# Altium PCB ChipTanks.PcbDoc
Units mil, origin at the board's own origin, x right, y up, seen from the top; angles counter-clockwise.
Board outline 3543.31 x 1181.1 mil, 2 copper layers (Top Layer, Bottom Layer), stack 65.792 mil thick; 56 components, 38 nets, 223 pads, 154 vias.
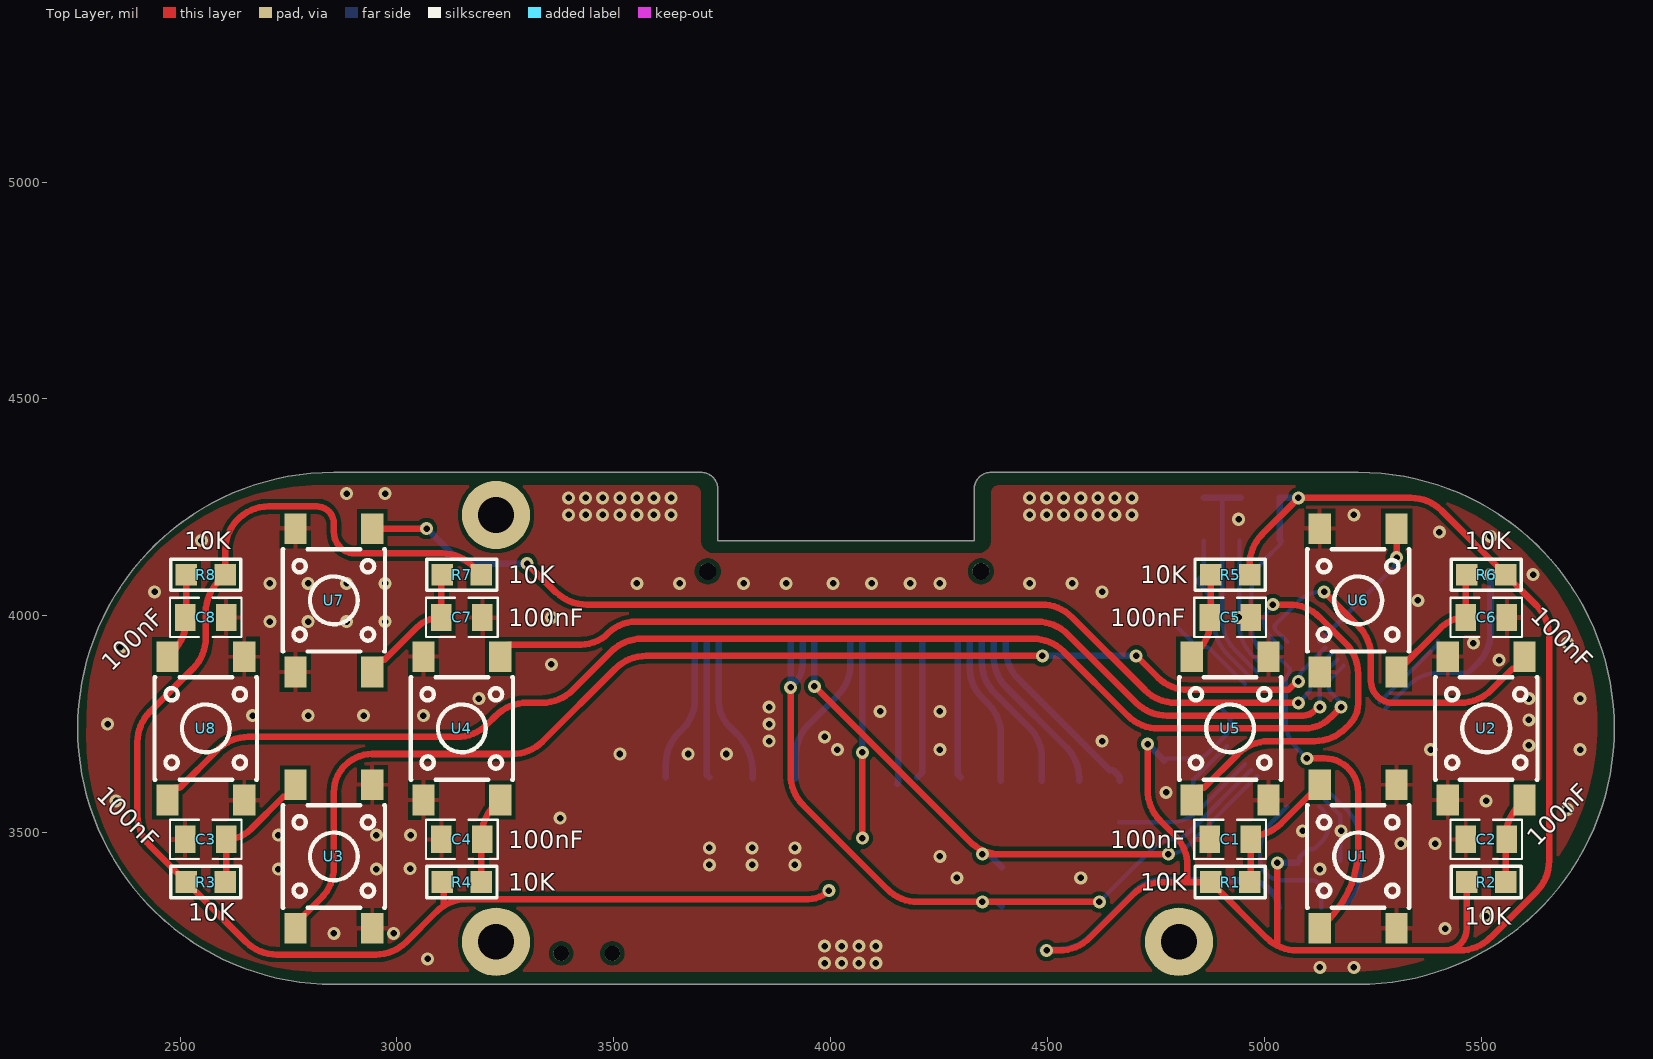
[diagram p0: Top Layer view]
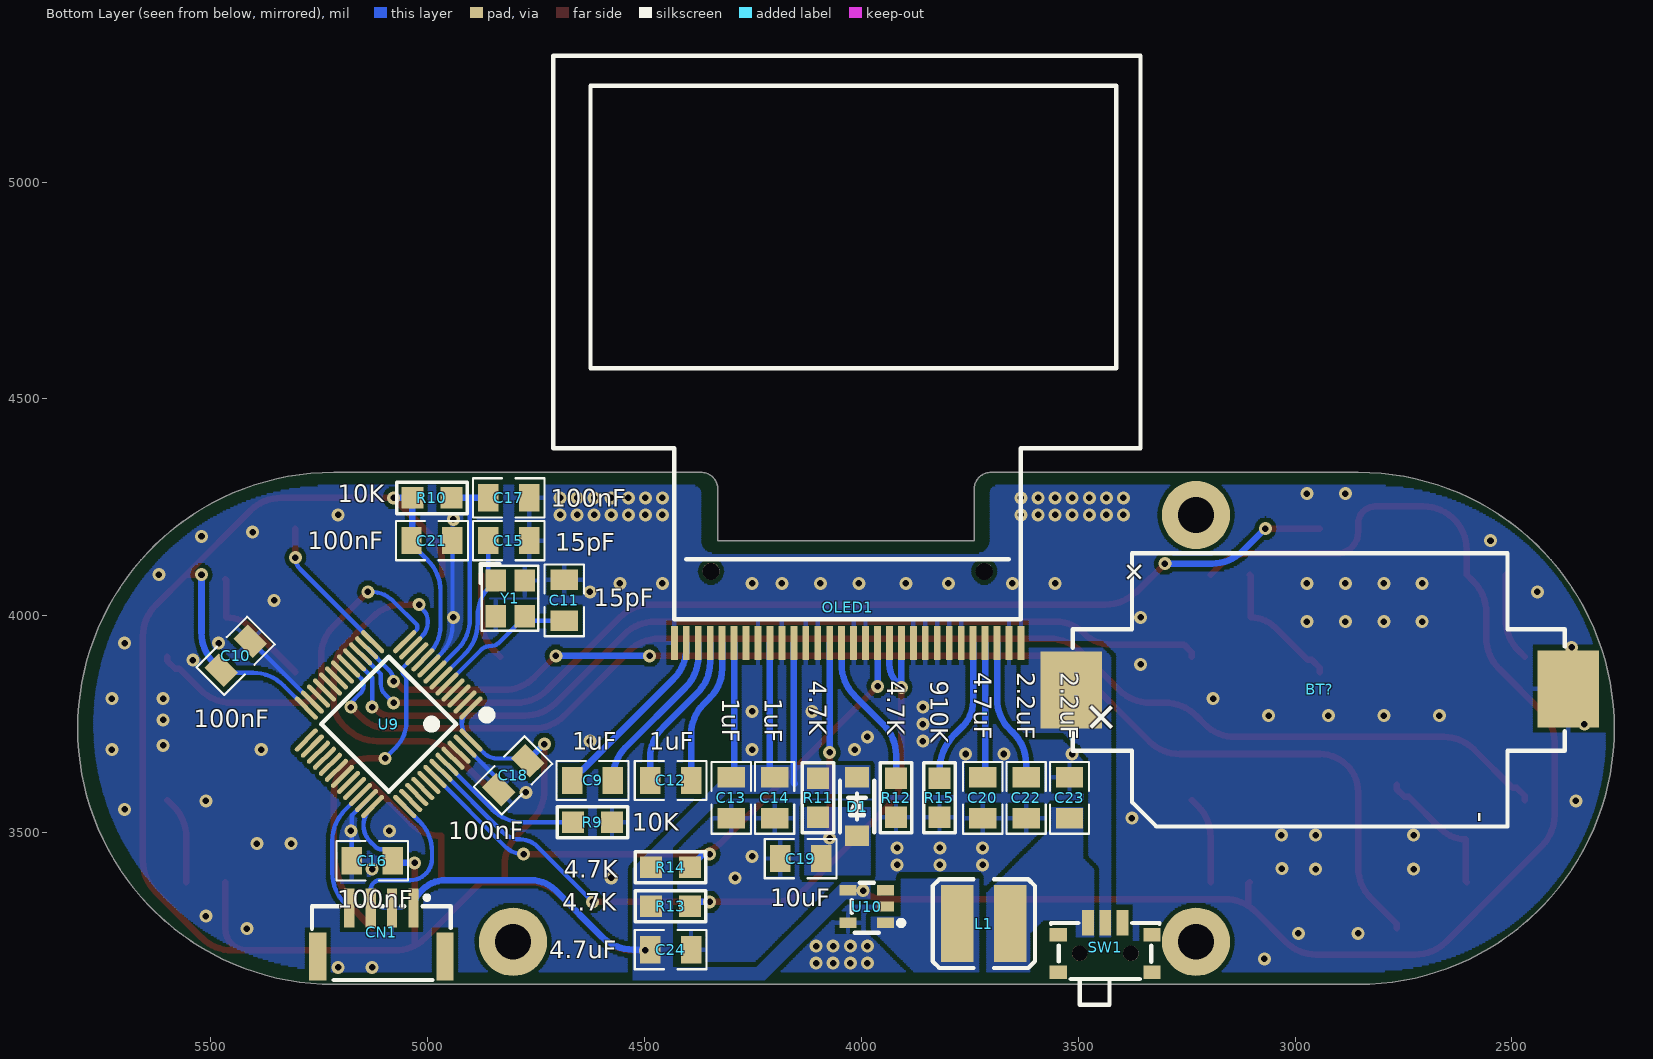
[diagram p1: Bottom Layer view, seen from below]
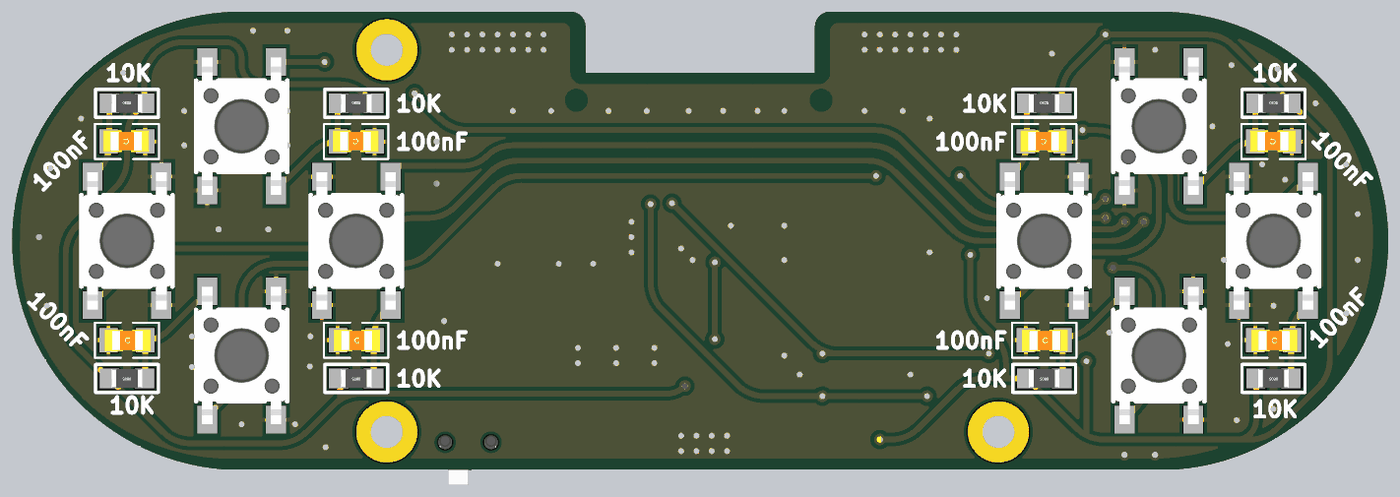
[diagram p2: 3D render of the assembled board from above, using the file's embedded part models]
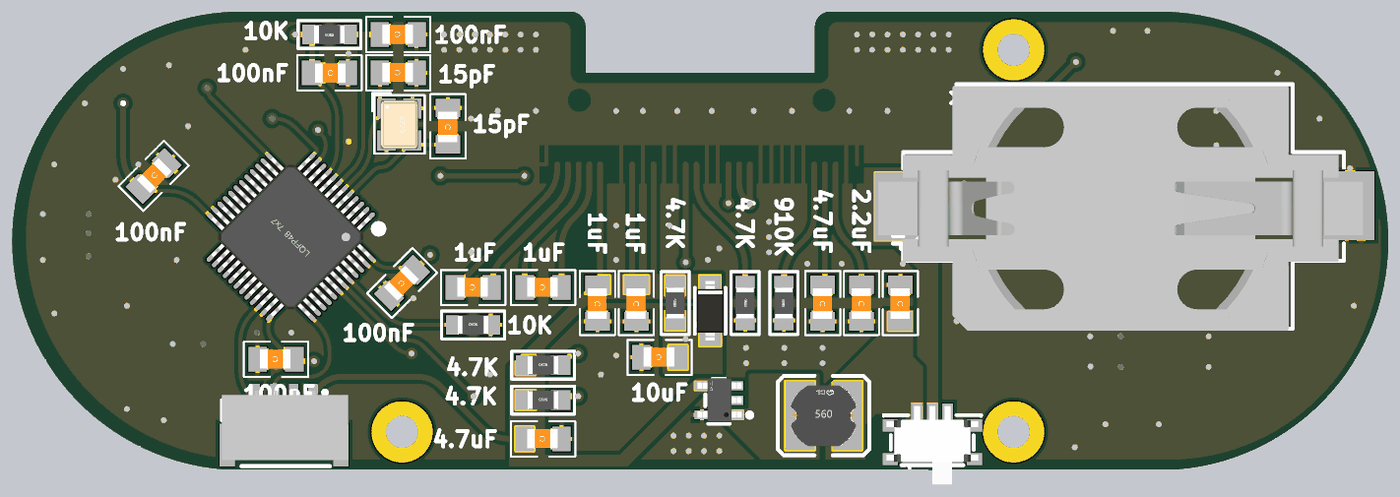
[diagram p3: 3D render of the assembled board from below, using the file's embedded part models]

## Layer stack, top to bottom
Top Solder: solder mask 0.4, Solder Resist, Dk 3.5
Top Layer: signal copper 1.4
Dielectric 1: dielectric 62.992, FR-4, Dk 4.8
Bottom Layer: signal copper 1.4
Bottom Solder: solder mask 0.4, Solder Resist, Dk 3.5

## Board outline
2854.33,3149.61 cw(c2854.33,3740.16) 2854.33,4330.71 3700.79,4330.71 cw(c3700.79,4291.34) 3740.16,4291.34 3740.16,4173.23 4330.71,4173.23 4330.71,4291.34 cw(c4370.08,4291.34) 4370.08,4330.71 5216.54,4330.71 cw(c5216.54,3740.16) 5216.54,3149.61

## Design rules (kind name [scope] priority, off if disabled: settings)
Clearance [All] p1: gap=6 ignorepadtopadclearanceinfootprint=FALSE except(0: Arc-Hole Track-Hole SMDPad-Hole THPad-Hole Via-Hole Fill-Hole Poly-Hole Region-Hole Text-Hole; 10: Arc-Fill Arc-Poly Arc-Region Track-Fill Track-Poly Track-Region SMDPad-Fill SMDPad-Poly SMDPad-Region THPad-Fill THPad-Poly THPad-Region Via-Fill Via-Poly Via-Region Fill-Fill Fill-Poly Fill-Region Poly-Poly Poly-Region Region-Region)
ComponentClearance [All] p1: gap=10 collisioncheckmode=3 verticalgap=10 showdistances=FALSE donotcheckwithout3dbody=TRUE
MinimumSolderMaskSliver [All] p1: minsoldermaskwidth=0
PlaneConnect [All] p1: planeconnectstyle=Direct reliefexpansion=20 reliefentries=4 reliefconductorwidth=10 reliefairgap=10
PolygonConnect PolygonConnect_8 [All vs IsNamedPolygon('GND_L02_P018')] p1: thpad.connectstyle=Relief thpad.reliefconductorwidth=10 thpad.reliefentries=4 thpad.polygonreliefangle="90 Angle" thpad.airgapwidth=10 smdpad.connectstyle=Relief smdpad.reliefconductorwidth=10 smdpad.reliefentries=4 smdpad.polygonreliefangle="90 Angle" smdpad.airgapwidth=10 via.connectstyle=Direct via.reliefconductorwidth=10 via.reliefentries=4 via.polygonreliefangle="90 Angle" via.airgapwidth=10
PolygonConnect PolygonConnect_7 [All vs IsNamedPolygon('GND_L01_P016')] p2: thpad.connectstyle=Relief thpad.reliefconductorwidth=10 thpad.reliefentries=4 thpad.polygonreliefangle="90 Angle" thpad.airgapwidth=10 smdpad.connectstyle=Relief smdpad.reliefconductorwidth=10 smdpad.reliefentries=4 smdpad.polygonreliefangle="90 Angle" smdpad.airgapwidth=10 via.connectstyle=Direct via.reliefconductorwidth=10 via.reliefentries=4 via.polygonreliefangle="90 Angle" via.airgapwidth=10
PolygonConnect PolygonConnect_6 [All vs IsNamedPolygon('GND_L02_P009')] p3: thpad.connectstyle=Relief thpad.reliefconductorwidth=10 thpad.reliefentries=4 thpad.polygonreliefangle="90 Angle" thpad.airgapwidth=10 smdpad.connectstyle=Relief smdpad.reliefconductorwidth=10 smdpad.reliefentries=4 smdpad.polygonreliefangle="90 Angle" smdpad.airgapwidth=10 via.connectstyle=Direct via.reliefconductorwidth=10 via.reliefentries=4 via.polygonreliefangle="90 Angle" via.airgapwidth=10
PolygonConnect PolygonConnect_5 [All vs IsNamedPolygon('GND_L01_P008')] p4: thpad.connectstyle=Relief thpad.reliefconductorwidth=10 thpad.reliefentries=4 thpad.polygonreliefangle="90 Angle" thpad.airgapwidth=10 smdpad.connectstyle=Relief smdpad.reliefconductorwidth=10 smdpad.reliefentries=4 smdpad.polygonreliefangle="90 Angle" smdpad.airgapwidth=10 via.connectstyle=Direct via.reliefconductorwidth=10 via.reliefentries=4 via.polygonreliefangle="90 Angle" via.airgapwidth=10
PolygonConnect 111 [All vs IsNamedPolygon('GND_L01_P008')] p5: thpad.connectstyle=Direct thpad.reliefconductorwidth=10 thpad.reliefentries=4 thpad.polygonreliefangle="90 Angle" thpad.airgapwidth=10 smdpad.connectstyle=Relief smdpad.reliefconductorwidth=10 smdpad.reliefentries=4 smdpad.polygonreliefangle="90 Angle" smdpad.airgapwidth=10 via.connectstyle=Relief via.reliefconductorwidth=10 via.reliefentries=4 via.polygonreliefangle="90 Angle" via.airgapwidth=10
PolygonConnect PolygonConnect_4 [All vs IsNamedPolygon('GND_L01_P008')] p6: thpad.connectstyle=Direct thpad.reliefconductorwidth=10 thpad.reliefentries=4 thpad.polygonreliefangle="90 Angle" thpad.airgapwidth=10 smdpad.connectstyle=Relief smdpad.reliefconductorwidth=10 smdpad.reliefentries=4 smdpad.polygonreliefangle="90 Angle" smdpad.airgapwidth=10 via.connectstyle=Relief via.reliefconductorwidth=10 via.reliefentries=4 via.polygonreliefangle="90 Angle" via.airgapwidth=10
PolygonConnect PolygonConnect_3 [All vs IsNamedPolygon('GND_L02_P009')] p7: thpad.connectstyle=Direct thpad.reliefconductorwidth=10 thpad.reliefentries=4 thpad.polygonreliefangle="90 Angle" thpad.airgapwidth=10 smdpad.connectstyle=Relief smdpad.reliefconductorwidth=10 smdpad.reliefentries=4 smdpad.polygonreliefangle="90 Angle" smdpad.airgapwidth=10 via.connectstyle=Relief via.reliefconductorwidth=10 via.reliefentries=4 via.polygonreliefangle="90 Angle" via.airgapwidth=10
PolygonConnect PolygonConnect_2 [All vs IsNamedPolygon('GND_L02_P009')] p8: connectstyle=Relief reliefconductorwidth=10 reliefentries=4 polygonreliefangle="90 Angle" airgapwidth=10
PolygonConnect PolygonConnect_1 [All vs IsNamedPolygon('GND_L01_P008')] p9: connectstyle=Relief reliefconductorwidth=10 reliefentries=4 polygonreliefangle="90 Angle" airgapwidth=10
PolygonConnect [All] p10: connectstyle=Direct reliefconductorwidth=10 reliefentries=4 polygonreliefangle="90 Angle" airgapwidth=10
RoutingVias [All] p1: holewidth=28 width=50 viastyle="Through Hole" minholewidth=15 minwidth=30 maxholewidth=28 maxwidth=50
SilkToSilkClearance [All] p1: silktosilkclearance=0
SilkToSolderMaskClearance [IsPad] p1: minsilkscreentomaskgap=0 clearancetoexposedcopper=TRUE
SolderMaskExpansion [All] p1: expansion=4 istentingtop=FALSE
Width [All] p1: maxlimit=15 minlimit=10 preferedwidth=10
25 further rules are at their usual default settings.

## Components (designator, comment, footprint, x,y, rotation, side; value= is the part's Value field where it differs from the comment)
BT? "BS-06-B4AA002" BAT-SMD_BS-06-B4BK006-1 2942.91,3828.74 r180 bottom
C1 "100nF" C0805 4921.26,3484.25 r0 top
C2 "100nF" C0805 5511.81,3484.25 r0 top
C3 "100nF" C0805 2559.06,3484.25 r0 top
C4 "100nF" C0805 3149.61,3484.25 r0 top
C5 "100nF" C0805 4921.26,3996.06 r180 top
C6 "100nF" C0805 5511.81,3996.06 r180 top
C7 "100nF" C0805 3149.61,3996.06 r180 top
C8 "100nF" C0805 2559.06,3996.06 r180 top
C9 "1uF" C0805 4620,3620 r0 bottom
C10 "100nF" C0805 5442.91,3907.48 r135 bottom
C11 "15pF" C0805 4685.04,4035.43 r270 bottom
C12 "1uF" C0805 4440,3620 r0 bottom
C13 "1uF" C0805 4300,3580 r270 bottom
C14 "1uF" C0805 4200,3580 r270 bottom
C15 "15pF" C0805 4812.99,4173.23 r0 bottom
C16 "100nF" C0805 5127.95,3435.04 r0 bottom
C17 "100nF" C0805 4812.99,4271.65 r0 bottom
C18 "100nF" C0805 4803.15,3631.89 r315 bottom
C19 "10uF" C0805 4140,3440 r0 bottom
C20 "4.7uF" C0805 3720,3580 r270 bottom
C21 "100nF" C0805 4990.16,4173.23 r180 bottom
C22 "2.2uF" C0805 3620,3580 r270 bottom
C23 "2.2uF" C0805 3520,3580 r270 bottom
C24 "4.7uF" C0805 4440,3230 r0 bottom
CN1 "卧式STLINK" CONN-SMD_4P-P1.25_GH1.25-4P 5106.85,3270 r180 bottom
D1 "12V" SOD-123 4010,3560 r90 bottom
L1 "2.2uH" IND-SMD_L4.5-W4.0 3717.64,3290 r0 bottom value=22uH
OLED1 "UG-2864KSWLG01" OLED-1.3 4033.52,4596.97 r0 bottom locked
R1 "10K" "R 0805_M" 4921.26,3385.83 r180 top
R2 "10K" "R 0805_M" 5511.81,3385.83 r180 top
R3 "10K" "R 0805_M" 2559.06,3385.83 r180 top
R4 "10K" "R 0805_M" 3149.61,3385.83 r180 top
R5 "10K" "R 0805_M" 4921.26,4094.49 r0 top
R6 "10K" "R 0805_M" 5511.81,4094.49 r0 top
R7 "10K" "R 0805_M" 3149.61,4094.49 r0 top
R8 "10K" "R 0805_M" 2559.06,4094.49 r0 top
R9 "10K" "R 0805_M" 4620.18,3523.62 r180 bottom
R10 "10K" "R 0805_M" 4990.16,4271.65 r0 bottom
R11 "4.7K" "R 0805_M" 4100,3580 r90 bottom
R12 "4.7K" "R 0805_M" 3920,3580 r270 bottom
R13 "4.7K" "R 0805_M" 4440,3330 r180 bottom
R14 "4.7K" "R 0805_M" 4440,3420 r180 bottom
R15 "910K" "R 0805_M" 3820,3580 r90 bottom
SW1 "MINI MSK12CO2" SW-SMD_MSK12CO2 3437.64,3210 r180 bottom
U1 "TPS645-5NC105" SW-SMD_4P-L6.0-W6.0-P4.50-LS9.2 5216.54,3444.88 r90 top locked
U2 "TPS645-5NC105" SW-SMD_4P-L6.0-W6.0-P4.50-LS9.2 5511.81,3740.16 r270 top locked
U3 "TPS645-5NC105" SW-SMD_4P-L6.0-W6.0-P4.50-LS9.2 2854.33,3444.88 r90 top locked
U4 "TPS645-5NC105" SW-SMD_4P-L6.0-W6.0-P4.50-LS9.2 3149.61,3740.16 r270 top locked
U5 "TPS645-5NC105" SW-SMD_4P-L6.0-W6.0-P4.50-LS9.2 4921.26,3740.16 r90 top locked
U6 "TPS645-5NC105" SW-SMD_4P-L6.0-W6.0-P4.50-LS9.2 5216.54,4035.43 r270 top locked
U7 "TPS645-5NC105" SW-SMD_4P-L6.0-W6.0-P4.50-LS9.2 2854.33,4035.43 r270 top locked
U8 "TPS645-5NC105" SW-SMD_4P-L6.0-W6.0-P4.50-LS9.2 2559.06,3740.16 r90 top locked
U9 "STM32F103C8T6" "LQFP48 7X7_N" 5090,3750 r45 bottom
U10 "TPS613221ADBVR" SOT-23-5_L2.9-W1.6-P0.95-LS2.8-BR 3976.38,3326.77 r180 bottom
Y1 "3225贴片晶振" OSC-3225-4P 4810,4040 r270 bottom value=16M

## Footprints (in the part's own frame and the unit in brackets; to place one, negate y for a bottom-side part, rotate by r counter-clockwise, add the part's x,y. Pads: shape width x height; smd on the part's side, far side on the other; paste and mask are expansions set on the pad)
BAT-SMD_BS-06-B4BK006-1 [mm]
  rect 3.6x4.5 smd paste+0 mask+0.051: 2(-14.55,0) 3(14.55,0.064)
  silkscreen extent -14.48,-8 14.35,8, body extent -16.1,-8.13 15.6,7.87, height 5.5
C0805 [mm]
  rect 1.2x1.6 smd: 1(-1.2,0) 2(1.2,0)
  silkscreen extent -2.1,-1.15 2.1,1.15, body extent -1.46,-0.72 1.54,0.68, height 0.93
CONN-SMD_4P-P1.25_GH1.25-4P [mm]
  rect 0.6x2.3 smd mask+0.051: 1(1.875,1.425) 2(0.625,1.425) 3(-0.625,1.425) 4(-1.875,1.425)
  rect 1x2.8 smd mask+0.051: 5(-3.725,-1.425) 6(3.725,-1.425)
  silkscreen extent -4.06,-2.8 4.06,2.16, body extent -4.07,-2.4 4.19,2.15, height 4.13
IND-SMD_L4.5-W4.0 [mm]
  rect 1.9x4.5 smd: 1(-1.55,0) 2(1.55,0)
  silkscreen extent -3,-2.6 3,2.6, body extent -2.16,-2 2.16,2, height 3.21
"LQFP48 7X7_N" [mm] "48脚，体宽7x7mm，脚距0.5mm"
  oval 0.279x1.8 smd: 1(-2.75,-4.075) 2(-2.25,-4.075) 3(-1.75,-4.075) 4(-1.25,-4.075) 5(-0.75,-4.075) 6(-0.25,-4.075) 7(0.25,-4.075) 8(0.75,-4.075) 9(1.25,-4.075) 10(1.75,-4.075) 11(2.25,-4.075) 12(2.75,-4.075) 25(2.75,4.075) 26(2.25,4.075) 27(1.75,4.075) 28(1.25,4.075) 29(0.75,4.075) 30(0.25,4.075) 31(-0.25,4.075) 32(-0.75,4.075) 33(-1.25,4.075) 34(-1.75,4.075) 35(-2.25,4.075) 36(-2.75,4.075)
  oval 1.8x0.279 smd: 13(4.075,-2.75) 14(4.075,-2.25) 15(4.075,-1.75) 16(4.075,-1.25) 17(4.075,-0.75) 18(4.075,-0.25) 19(4.075,0.25) 20(4.075,0.75) 21(4.075,1.25) 22(4.075,1.75) 23(4.075,2.25) 24(4.075,2.75) 37(-4.075,2.75) 38(-4.075,2.25) 39(-4.075,1.75) 40(-4.075,1.25) 41(-4.075,0.75) 42(-4.075,0.25) 43(-4.075,-0.25) 44(-4.075,-0.75) 45(-4.075,-1.25) 46(-4.075,-1.75) 47(-4.075,-2.25) 48(-4.075,-2.75)
  silkscreen extent -3.93,-4.69 2.79,2.79, body extent -4.5,-4.5 4.5,4.5, height 1.45
OLED-1.3 [mm]
  rect 0.4x2 smd paste+0 mask+0.051: 1(10.102,16.763) 2(9.402,16.764) 3(8.702,16.763) 4(8.002,16.763) 5(7.302,16.763) 6(6.603,16.763) 7(5.903,16.763) 8(5.203,16.763) 9(4.503,16.763) 10(3.803,16.763) 11(3.102,16.763) 12(2.402,16.763) 13(1.702,16.763) 14(1.002,16.763) 15(0.303,16.763) 16(-0.397,16.763) 17(-1.097,16.763) 18(-1.797,16.763) 19(-2.498,16.764) 20(-3.197,16.763) 21(-3.898,16.762) 22(-4.598,16.763) 23(-5.298,16.763) 24(-5.998,16.763) 25(-6.698,16.764) 26(-7.397,16.763) 27(-8.097,16.764) 28(-8.797,16.763) 29(-9.497,16.763) 30(-10.197,16.763)
  round 1 hole 1 unplated paste+0: ""(-8.048,12.563) ""(7.953,12.563)
  silkscreen extent -17.2,-17.64 17.2,15.37, body extent -17.25,-17.22 17.25,17.79, height 1.42
OSC-3225-4P [mm] "3.2*2.5*0.7mm(长宽高)                             淘宝ID:黄晶宝石"
  rect 1.3x1.2 smd: 1(-1.05,-0.85) 2(1.05,-0.85) 3(1.05,0.85) 4(-1.05,0.85)
  silkscreen extent -2.03,-1.75 1.91,1.65, body extent -1.6,-1.25 1.6,1.25, height 0.7
"R 0805_M" [mil] "1/8W贴片电阻"
  rect 50x50 smd: 1(-45,0) 2(45,0)
  silkscreen extent -81,-36 81,36, body extent -39,-25 39,25, height 20
SOD-123 [mm]
  rect 1.2x1.4 smd: 1(-1.7,0) 2(1.7,0)
  silkscreen extent -1.5,-1 1.5,1, body extent -1.95,-0.9 1.95,0.9, height 1.18
SOT-23-5_L2.9-W1.6-P0.95-LS2.8-BR [mm]
  rect 1x0.6 smd paste+0 mask+0.05: 1(0.82,-0.886) 2(0.82,0.064) 3(0.82,1.013) 4(-1.38,1.014) 5(-1.38,-0.886)
  silkscreen extent -1.17,-1.46 1.88,1.46, body extent -1.69,-1.36 1.21,1.54, height 1.09
SW-SMD_4P-L6.0-W6.0-P4.50-LS9.2 [mm]
  rect 1.8x1.3 smd paste+0 mask+0.051: 1(-4.2,2.25) 2(4.2,2.25) 3(-4.2,-2.25) 4(4.2,-2.25)
  silkscreen extent -3,-3 3,3, body extent -4.5,-3 4.5,3, height 6.51
SW-SMD_MSK12CO2 [mm]
  rect 0.7x1.5 smd paste+0 mask+0.051: 1(-1,2.089) 2(0,2.089) 3(1,2.089)
  rect 1x0.8 smd paste+0 mask+0.051: 4(-2.75,-0.812) 4(-2.75,1.389) 5(2.75,-0.812) 5(2.75,1.388)
  round 0.9 hole 0.9 unplated paste+0: ""(-1.5,0.288) ""(1.5,0.288)
  silkscreen extent -3.17,-2.71 3.18,2.07, body extent -3,-2.49 3,2.66, height 1.4

## Part data
C1 C2 C3 C4 C5 C6 C7 C8 C9 C10 C11 C12 C13 C14 C15 C16 C17 C18 C19 C20 C21 C22 C23 C24: library part 0402贴片电容, "贴片电容0402"
D1: library part "DIODE ZENER", "稳压二极管"
L1: library part CD43功率电感, "功率电感", DC Resistance (DCR)=230mΩ, JLCPCB Part Class="Extended Part", LCSC Part Name="22uH ±20%", Manufacturer=MINGSTAR(登壹), Manufacturer Part=CD43N-220M, Rated Current=930mA, Ratings=-, Tolerance=±20%, Add into BOM=yes, Convert to PCB=yes, Datasheet=https://atta.szlcsc.com/upload/public/pdf/source/20210524/C2832086_3DE1D5B4C4DE81ED72BC30D5D3934BF5.pdf, Device=CD43N-220M, Name=22uH, Saturation Current (Isat)=-, Supplier=LCSC, Supplier Footprint=SMD,4.5x4mm, Supplier Part=C2832086, Symbol=CD43N-220M
R1 R2 R3 R4 R5 R6 R7 R8 R9 R10 R11 R12 R13 R14 R15: library part 0402贴片电阻, "0402贴片电阻"
U9: JLCPCB Part Class="Extended Part", Low-Voltage Detect=有, Manufacturer=ST(意法半导体), Operating Temperature Range=-40℃~+85℃, Operating Voltage Range=2V~3.6V, ADC (Bit)=12bit, Add into BOM=yes, CCP Capture/Compare=-, communication protocol=-, Convert to PCB=yes, CPU Core=ARM-M3, CPU Maximum Speed=72MHz, DAC (Bit)=-, Datasheet=https://atta.szlcsc.com/upload/public/pdf/source/20220812/8363ACEC51AD55ECEB84799464F7CB85.pdf, Device=STM32F103C8T6, Direct Memory Access=有, GPIO Ports Number=37, Infrared Data Association=有, Internal Comparator=-, Internal Oscillator=有, LCSC Part Name=STM32F103C8T6, Manufacturer Part=STM32F103C8T6, Name=STM32F103C8T6, Peripheral/Function=看门狗；DMA；看门狗；温度传感器, Program Memory Type=FLASH, Program Storage Size=64KB, PWM (Bit)=-, RAM Size=20KB, Real-Time Clock=-, Secure Digital Input and Output=-, Supplier=LCSC, Supplier Footprint=LQFP-48(7x7), Supplier Part=C8734, Symbol=STM32F103C8T6, Universal Serial Bus=有, Watchdog=有

## Free pads (board coordinates)
  round 157.48 hole 82.68: 5(3228.35,3248.03) 5(3228.35,4232.28) 5(4803.15,3248.03)

## Via types
v1: diameter 30, hole 15, Top Layer to Bottom Layer, tented both sides, 154 vias

## Nets (pads, with @x,y where several pads share a name; then routed paths per layer and width w, separated by ;. In a path a pad name is that pad's centre, name@x,y a point inside that pad or via, vN(x,y) a via of type N, cw(c..) or ccw(c..) an arc to the next point about the centre after c; other vN are vias at no path point)
GND: BT?.3 C1.1 C2.1 C3.1 C4.1 C5.1 C6.1 C7.1 C8.1 C10.2 C11.1 C13.2 C14.2 C15.1 C16.2 C17.1 C18.2 C19.2 C20.2 C21.2 C22.2 C23.1 C24.1 CN1.2 OLED1.1 OLED1.8 OLED1.10 OLED1.12 OLED1.13 OLED1.16 OLED1.17 OLED1.21 OLED1.22 OLED1.23 OLED1.24 OLED1.25 OLED1.29 OLED1.30 R9.2 R12.2 R15.1 U1.3 U1.4 U2.3 U2.4 U3.3 U3.4 U4.3 U4.4 U5.3 U5.4 U6.3 U6.4 U7.3 U7.4 U8.3 U8.4 U9.8 U9.23 U9.35 U9.47 U10.2 U10.5 Y1.2 Y1.4 | length 788.7
  Bottom Layer w10: C18.2 4836.56,3621.83 U9.47 ; C21.2 4942.91,3977.39 ccw(c5035.97,3977.39) 4970.17,3911.59 U9.8 ; U9.35 5175.2,3539.53 C16.2 ; U9.23 5399.66,3934.39 C10.2@5399.66,3940.89
  other v1: 5127.95,3188.98 5206.69,3188.98 3986.22,3198.82 4025.59,3198.82 4064.96,3198.82 4104.33,3198.82 3070.87,3208.66 3986.22,3238.19 4025.59,3238.19 4064.96,3238.19 4104.33,3238.19 2854.33,3267.72 2992.13,3267.72 5416.97,3278.18 5511.81,3307.09 4291.34,3395.67 4576.77,3395.67 2726.38,3415.35 2952.76,3415.35 5127.95,3415.35 3030.22,3416.73 3720.47,3425.2 3818.9,3425.2 3917.32,3425.2 4251.97,3444.88 3720.47,3464.57 3818.9,3464.57 3917.32,3464.57 5314.96,3474.41 5393.7,3474.41 2726.38,3494.09 2952.76,3494.09 3031.5,3494.09 5088.58,3503.94 5177.17,3503.94 3375.98,3533.46 5698.82,3553.15 2352.36,3572.83 5511.81,3572.83 4773.62,3592.52 3513.78,3681.1 3671.26,3681.1 3759.84,3681.1 4015.75,3690.94 4251.97,3690.94 5383.86,3690.94 5728.35,3690.94 5610.24,3700.79 3858.27,3710.63 4625.98,3710.63 3986.22,3720.47 2332.68,3750 3858.27,3750 5610.24,3759.84 2667.32,3769.68 2795.28,3769.68 2923.23,3769.68 3061.02,3769.68 4114.17,3779.53 4251.97,3779.53 3858.27,3789.37 3188.98,3809.06 5610.24,3809.06 5728.35,3809.06 3356.3,3887.8 5541.34,3897.64 2362.2,3927.17 5482.28,3937.01 5698.82,3937.01 2706.69,3986.22 2795.28,3986.22 2883.86,3986.22 2972.44,3986.22 3356.3,3996.06 4940.94,3996.06 5354.33,4035.43 2440.94,4055.12 4625.98,4055.12 2706.69,4074.8 2795.28,4074.8 2883.86,4074.8 2972.44,4074.8 3553.15,4074.8 3651.57,4074.8 3799.21,4074.8 3897.64,4074.8 4005.91,4074.8 4094.49,4074.8 4183.07,4074.8 4251.97,4074.8 4458.66,4074.8 4557.09,4074.8 5620.08,4094.49 2549.21,4173.23 5521.65,4183.07 5403.54,4192.91 4940.94,4222.44 3395.67,4232.28 3435.04,4232.28 3474.41,4232.28 3513.78,4232.28 3553.15,4232.28 3592.52,4232.28 3631.89,4232.28 4458.66,4232.28 4498.03,4232.28 4537.4,4232.28 4576.77,4232.28 4616.14,4232.28 4655.51,4232.28 4694.88,4232.28 5206.69,4232.28 3395.67,4271.65 3435.04,4271.65 3474.41,4271.65 3513.78,4271.65 3553.15,4271.65 3592.52,4271.65 3631.89,4271.65 4458.66,4271.65 4498.03,4271.65 4537.4,4271.65 4576.77,4271.65 4616.14,4271.65 4655.51,4271.65 4694.88,4271.65 2883.86,4281.5 2972.44,4281.5
I2C1_SCL: OLED1.18 R14.2 U9.42 | length 1428.2
  Top Layer w15: v1(3962.76,3837.24) 4320.71,3479.29 ccw(c4391.42,3550) 4391.42,3450 ; v1(4350,3450) 4391.42,3450 ; v1(4778.74,3450) 4391.42,3450
  Bottom Layer w10: v1(4778.74,3450) ccw(c4778.74,3510.79) 4799.97,3453.83 ccw(c4778.74,3510.79) 4821.71,3467.79 U9.42
  Bottom Layer w15: v1(3962.76,3837.24) OLED1.18 ; 4367.87,3447.13 R14.2
I2C1_SDA: OLED1.19 OLED1.20 R13.2 U9.43 | length 1783.3
  Top Layer w15: v1(3907.64,3835) 3907.64,3633.78 ccw(c4007.64,3633.78) 3936.93,3563.07 4130.71,3369.29 ccw(c4201.42,3440) 4201.42,3340 v1(4350,3340) v1(4619.53,3340)
  Bottom Layer w10: v1(4619.53,3340) 4747.32,3467.79 cw(c4787.06,3428.06) 4787.06,3484.25 ccw(c4787.06,3540.45) 4826.79,3500.71 U9.43
  Bottom Layer w15: OLED1.20 v1(3907.64,3835) v1@3917.35,3844.71 ; v1@3917.36,3844.73 ccw(c3874.27,3887.8) 3935.2,3887.8 OLED1.19 ; v1(4350,3340) 4385,3340 R13.2
KEY_C1: U3.1 U9.14 | length 2843.7
  Top Layer w15: U3.1 2765.76,3289.38 2825.04,3348.66 ccw(c2754.33,3419.37) 2854.33,3419.37 2854.33,3592.52 cw(c2942.91,3592.52) 2942.91,3681.1 3265.67,3681.1 ccw(c3265.67,3781.1) 3336.38,3710.39 3504.18,3878.19 cw(c3574.89,3807.48) 3574.89,3907.48 v1(4488.19,3907.48) ; v1(4704.72,3907.48) 4754.18,3858.03 ccw(c4824.89,3928.74) 4824.89,3828.74 5055,3828.74 5074.68,3848.43 v1(5078.74,3848.43)
  Bottom Layer w10: v1(5078.74,3848.43) cw(c5116.38,3848.43) 5082.16,3864.1 cw(c5116.38,3848.43) 5089.75,3875.03 U9.14
  Bottom Layer w15: v1(4488.19,3907.48) v1(4704.72,3907.48)
KEY_C2: U7.1 U9.15 | length 2427.7
  Top Layer w15: U7.1 v1(3068.11,4200.78) ; v1(3300,4120) 3364.23,4055.77 ccw(c3366.38,4057.92) 3366.38,4054.88 ccw(c3437.09,4125.59) 3437.09,4025.59 4486.14,4025.59 cw(c4486.14,3925.59) 4556.85,3996.3 4724.65,3828.5 ccw(c4795.36,3899.21) 4795.36,3799.21 v1(5078.74,3799.21)
  Bottom Layer w10: v1(5078.74,3799.21) 5098.43,3818.9 ccw(c5074.66,3842.66) 5108.27,3842.66 5108.27,3865.7 U9.15
  Bottom Layer w15: v1(3068.11,4200.78) cw(c3068.11,4198.11) 3069.99,4200.01 3120.71,4149.29 ccw(c3191.42,4220) 3191.42,4120 v1(3300,4120)
KEY_C3: U4.1 U9.16 | length 2134.8
  Top Layer w15: U4.1 3238.18,3915.35 3256.27,3933.44 3423.68,3933.44 ccw(c3423.68,4023.54) 3487.37,3959.81 ; 3487.41,3959.85 cw(c3551.1,3896.12) 3551.1,3986.22 4476.3,3986.22 cw(c4476.3,3886.22) 4547.01,3956.93 4704.96,3798.97 ccw(c4775.67,3869.68) 4775.67,3769.68 5090.29,3769.68 ccw(c5090.29,3803.29) 5114.03,3779.5 ; 5114.05,3779.53 5123.89,3789.37 v1(5127.95,3789.37)
  Bottom Layer w10: v1(5127.95,3789.37) 5127.95,3857.55 U9.16
KEY_C4: U8.1 U9.17 | length 3058.4
  Top Layer w15: U8.1 2470.48,3584.65 2488.57,3602.74 2498.42,3602.74 2586.86,3691.18 cw(c2657.57,3620.47) 2657.57,3720.47 3137.71,3720.47 ccw(c3137.71,3820.47) 3208.42,3749.76 3228.58,3769.92 cw(c3299.3,3699.21) 3299.3,3799.21 3334.56,3799.21 ccw(c3334.56,3899.21) 3405.27,3828.5 3494.33,3917.56 cw(c3565.04,3846.85) 3565.04,3946.85 4466.45,3946.85 cw(c4466.45,3846.85) 4537.16,3917.56 4685.28,3769.45 ccw(c4755.99,3840.16) 4755.99,3740.16 5093.15,3740.16 ccw(c5093.15,3824.17) 5152.56,3764.76 v1(5177.17,3789.37)
  Bottom Layer w10: 5154.83,3856.31 ccw(c5172.25,3838.93) 5147.64,3838.93 ccw(c5172.25,3838.93) 5154.83,3821.55 5177.17,3799.21 v1(5177.17,3789.37) ; 5154.85,3856.33 5182.58,3884.06 U9.17
KEY_R1: U1.1 U9.10 | length 777
  Top Layer w15: v1(5098.43,3671.26) 5137.8,3671.26 cw(c5137.8,3592.52) 5216.54,3592.52 5216.54,3465.21 cw(c4982.12,3465.21) 5147.88,3299.45 U1.1
  Bottom Layer w10: U9.10 5025.26,3911.9 5059.06,3878.11 5059.06,3875.07 cw(c5042.25,3875.07) 5054.15,3863.2 ccw(c5066.02,3851.31) 5049.21,3851.31 5049.21,3755.27 ccw(c5133.22,3755.27) 5073.82,3695.87 v1(5098.43,3671.26)
KEY_R2: U5.1 U9.11 | length 954.3
  Top Layer w15: U5.1 4832.69,3584.65 4850.78,3602.74 4860.62,3602.74 4939.22,3681.34 cw(c5009.93,3610.63) 5009.93,3710.63 5116.06,3710.63 ccw(c5116.06,3810.63) 5186.77,3739.92 5196.85,3750 ccw(c5149.33,3797.52) 5216.54,3797.52 5216.54,3866.06 ccw(c5116.54,3866.06) 5187.25,3936.77 5127.71,3996.3 ccw(c5057,3925.59) 5057,4025.59 v1(5019.69,4025.59)
  Bottom Layer w10: v1(5019.69,4025.59) 5019.69,4022.53 5009.84,4012.69 ccw(c5033.6,3988.93) 5000,3988.93 5000,3984.06 ccw(c5045.36,3984.06) 5013.28,3951.99 U9.11
KEY_R3: U2.1 U9.12 | length 867.5
  Top Layer w15: v1(5137.8,4055.12) 5216.77,3976.14 cw(c5146.06,3905.43) 5246.06,3905.43 5246.06,3849.62 ccw(c5296.47,3849.62) 5260.83,3813.98 ccw(c5296.47,3849.62) 5296.47,3799.21 5452.67,3799.21 ccw(c5452.67,3899.21) 5523.38,3828.5 5572.45,3877.57 5582.29,3877.57 5600.38,3895.66 U2.1
  Bottom Layer w10: U9.12 5053.1,3940.28 5023.83,3969.56 5023.83,3977.84 5080.08,4034.09 cw(c5130.84,3983.34) 5130.84,4055.12 v1(5137.8,4055.12)
KEY_R4: U6.1 U9.13 | length 333
  Top Layer w15: v1(5305.11,4133.85) U6.1
  Bottom Layer w10: U9.13 5294.06,4107.17 ; 5294.08,4107.19 ccw(c5267.38,4133.85) 5301.28,4117.29 ccw(c5267.38,4133.85) v1(5305.11,4133.85)
NetBT?_2: BT?.2 SW1.2
NetC1_2: C1.2 R1.1 U1.2 | length 301.5
  Top Layer w15: R1.1@4966.26,3395.67 4968.5,3397.91 C1.2 4968.5,3492.13 ccw(c4968.5,3591.97) 5022.9,3508.25 ccw(c4968.5,3591.97) 5039.1,3521.37 U1.2
NetC2_2: C2.2 R2.1 U2.2 | length 202.7
  Top Layer w15: R2.1 5556.81,3489.82 cw(c5656.81,3489.82) 5565.1,3529.69 cw(c5656.81,3489.82) 5586.1,3560.53 U2.2
NetC3_2: C3.2 R3.1 U3.2 | length 313.3
  Top Layer w15: R3.1 2606.3,3388.07 C3.2 ccw(c2606.3,3565.08) 2663.46,3507.93 2737.83,3582.3 2747.67,3582.3 2765.76,3600.39 U3.2
NetC4_2: C4.2 R4.1 U4.2 | length 202.7
  Top Layer w15: R4.1 3194.61,3489.82 cw(c3294.61,3489.82) 3202.9,3529.69 cw(c3294.61,3489.82) 3223.9,3560.53 U4.2
NetC5_2: C5.2 R5.1 U5.2 | length 202.7
  Top Layer w15: U5.2 4846.97,3919.79 ccw(c4776.26,3990.5) 4867.97,3950.63 ccw(c4776.26,3990.5) 4876.26,3990.5 R5.1
NetC6_2: C6.2 R6.1 U6.2 | length 297.7
  Top Layer w15: U6.2 5407.41,3972.39 cw(c5464.57,3915.23) C6.2 5464.57,4082.4 R6.1@5466.81,4084.65
NetC7_2: C7.2 R7.1 U7.2 | length 313.3
  Top Layer w15: U7.2 2942.9,3879.93 2960.99,3898.02 2970.84,3898.02 3045.21,3972.39 cw(c3102.36,3915.23) C7.2 3102.36,4092.24 R7.1
NetC8_2: C8.2 R8.1 U8.2 | length 202.7
  Top Layer w15: U8.2 2484.77,3919.79 ccw(c2414.06,3990.5) 2505.76,3950.63 ccw(c2414.06,3990.5) 2514.06,3990.5 R8.1
NetC9_1: C9.1 OLED1.3 | length 389.8
  Bottom Layer w15: OLED1.3 4376.14,3905.28 ccw(c4476.14,3905.28) 4405.43,3834.57 4543.47,3696.53 cw(c4472.76,3625.82) 4572.76,3625.82 C9.1
NetC9_2: C9.2 OLED1.2 | length 426.4
  Bottom Layer w15: OLED1.2 4403.7,3924.97 ccw(c4503.7,3924.97) 4432.99,3854.25 4643.25,3644 4651.12,3644 4667.24,3627.87 C9.2
NetC11_2: C11.2 U9.5 Y1.3 | length 335.4
  Bottom Layer w10: C11.2 4768.03,3988.19 4776.54,3996.69 4834.38,3938.84 ccw(c4855.73,3960.19) 4855.73,3930 cw(c4855.73,3899.81) 4877.09,3921.16 U9.5
NetC12_1: C12.1 OLED1.5 | length 338.4
  Bottom Layer w15: OLED1.5 4321.02,3877.95 ccw(c4415.1,3877.95) 4348.56,3811.44 4363.47,3796.53 cw(c4292.76,3725.82) 4392.76,3725.82 C12.1
NetC12_2: C12.2 OLED1.4 | length 365.8
  Bottom Layer w15: OLED1.4 4348.58,3892.84 ccw(c4448.58,3892.84) 4377.87,3822.13 4457.95,3742.05 cw(c4387.24,3671.33) 4487.24,3671.33 C12.2
NetC15_2: C15.2 U9.6 Y1.1 | length 401.8
  Bottom Layer w10: Y1.1 4844.45,4080.35 4855.71,4069.09 cw(c4785,3998.38) Y1.1@4866.48,4056.35 ; C15.2 4860.24,4096.14 4843.46,4079.37 Y1.1@4866.48,4056.35 ; U9.6 4914.29,3911.79 cw(c4985,3982.5) 4885,3982.5 4885,3998.38 ccw(c4785,3998.38) Y1.1@4866.48,4056.35
NetC19_1: C19.1 D1.1 OLED1.14 R11.1 | length 450.1
  Top Layer w15: v1(4072.99,3487.01) 4073.07,3487.09 v1(4073.14,3684.84) v1(4073.14,3684.84)
  Bottom Layer w15: OLED1.14 4073.07,3936.93 4073.07,3684.91 v1(4073.14,3684.84)
NetC20_1: C20.1 OLED1.27 | length 311.9
  Bottom Layer w15: OLED1.27 3714.72,3632.52 C20.1
NetC22_1: C22.1 OLED1.28 | length 329
  Bottom Layer w15: C22.1 3620,3658.58 cw(c3720,3658.58) 3649.29,3729.29 3657.88,3737.88 ccw(c3587.17,3808.59) 3687.17,3808.59 OLED1.28
NetC23_2: C23.2 L1.1 SW1.1
NetL1_2: L1.2 U10.1
NetOLED1_15: OLED1.15 R12.1 | length 355.4
  Bottom Layer w15: R12.1 3920,3678.58 cw(c4020,3678.58) 3949.29,3749.29 4016.14,3816.14 ccw(c3945.43,3886.85) 4045.43,3886.85 OLED1.15
NetOLED1_26: OLED1.26 R15.2 | length 335.6
  Bottom Layer w15: OLED1.26 3742.29,3802.3 3742.29,3802.25 ccw(c3822.62,3802.22) 3765.82,3745.42 3784.95,3726.28 cw(c3700.34,3641.67) 3820,3641.65 3820,3641.59 R15.2
NetR9_1: R9.1 U9.44 | length 341.6
  Bottom Layer w10: R9.1 4780.44,3523.62 ccw(c4780.44,3623.62) 4851.15,3552.91 U9.44
NRST: C17.2 R10.1 U9.7 | length 515.3
  Bottom Layer w10: 4902.7,4271.65 4902.7,3992.64 ccw(c5002.7,3992.64) 4931.99,3921.93 U9.7
  Bottom Layer w15: C17.2 4902.7,4271.65 R10.1
SWCLK: CN1.3 U9.37 | length 366.5
  Bottom Layer w10: U9.37 5019.29,3526.18 ccw(c5090,3455.47) 4990,3455.47 4990,3440 ccw(c5040,3440) 5040,3390 5110,3390 cw(c5110,3368.54) 5131.46,3368.54 CN1.3
SWDIO: CN1.4 U9.34 | length 296.4
  Bottom Layer w10: U9.34 5190.71,3551.85 cw(c5120,3481.14) 5220,3481.14 5220,3406.85 cw(c5120,3406.85) 5190.71,3336.14 CN1.4
VCC: C10.1 C13.1 C14.1 C16.1 C18.1 C21.1 C24.2 CN1.1 D1.2 OLED1.6 OLED1.9 OLED1.11 R1.2 R2.2 R3.2 R4.2 R5.2 R6.2 R7.2 R8.2 R10.2 R11.2 R13.1 R14.1 U9.1 U9.9 U9.24 U9.36 U9.48 U10.4 | length 9914.6
  Top Layer w15: R4.2 3107.7,3382.74 3107.7,3330.75 ; R7.2 3174.68,4114.41 ccw(c3103.97,4043.7) 3103.97,4143.7 2903.54,4143.7 cw(c2903.54,4192.91) 2854.33,4192.91 2854.33,4212.6 ccw(c2814.96,4212.6) 2814.96,4251.97 2704.06,4251.97 ccw(c2704.06,4151.97) 2604.06,4151.97 R8.2 2588.34,4078.78 ccw(c2659.06,4008.07) 2559.06,4008.07 2559.06,3948.9 cw(c2459.06,3948.9) 2529.77,3878.19 2430.86,3779.29 ccw(c2501.57,3708.58) 2401.57,3708.58 2401.57,3539.73 ccw(c2501.57,3539.73) 2430.86,3469.02 R3.2 2652.09,3247.79 ccw(c2722.8,3318.5) 2722.8,3218.5 2950.7,3218.5 ccw(c2950.7,3318.5) 3021.42,3247.79 3090.79,3317.17 cw(c3161.5,3246.46) 3107.7,3330.75 ; v1(3996.06,3366.14) cw(c3948.54,3413.67) 3948.54,3346.46 3948.48,3346.46 3161.5,3346.46 ccw(c3161.5,3246.46) 3107.7,3330.75 ; v1(4498.03,3228.35) 4526.93,3228.35 ccw(c4526.93,3328.35) 4597.64,3257.64 4696.54,3356.54 cw(c4767.25,3285.83) 4767.25,3385.83 4822.83,3385.83 ; v1(4731.01,3704.03) 4731.01,3597.81 ccw(c4831.01,3597.81) 4760.3,3527.1 4793.55,3493.86 cw(c4722.83,3423.15) 4822.83,3423.15 4822.83,3385.83 ; R5.2 4966.26,4117.75 cw(c5066.26,4117.75) 4995.55,4188.46 v1(5078.74,4271.65) 5338.22,4271.65 cw(c5338.22,4171.65) 5408.93,4242.36 R6.2 ; v1(5030,3430) 5029.53,3429.53 5029.53,3239.37 ; R2.2 5466.81,3278.18 cw(c5416.97,3278.18) 5428.93,3229.8 cw(c5416.97,3278.18) 5416.97,3228.35 ; v1(5521.65,4094.49) R6.2 ; 4822.83,3385.83 R1.2 5004.45,3257.64 ccw(c5075.16,3328.35) 5029.53,3239.37 ; 5029.53,3239.37 ccw(c5075.16,3328.35) 5075.16,3228.35 5416.97,3228.35 ; 5416.97,3228.35 5450.7,3228.35 ccw(c5450.7,3328.35) 5521.42,3257.64 5627.52,3363.74 ccw(c5556.81,3434.45) 5656.81,3434.45 5656.81,3953.07 ccw(c5556.81,3953.07) 5627.52,4023.78 R6.2
  Bottom Layer w10: C18.1 4775.31,3670.86 4840.4,3670.86 ccw(c4840.4,3712.75) 4870.01,3683.12 ; 4870.02,3683.13 U9.48 4910.03,3723.14 ccw(c4883.17,3750) 4921.15,3750 ; U9.1 U9.1@4910.03,3776.86 ; U9.9 4996.81,3912.78 cw(c5060.41,3976.38) 4970.47,3976.38 4970.47,4057 cw(c5070.47,4057) 4999.76,4127.71 5037.4,4165.35 C21.1 ; C16.1 5080.71,3442.91 5099.33,3461.54 5107.2,3461.54 ccw(c5107.2,3480.54) 5120.63,3467.09 5132.4,3478.86 ccw(c5094.59,3516.67) 5148.06,3516.67 ccw(c5094.59,3516.67) 5132.42,3554.46 U9.36 ; U9.24 5332.33,3839.22 cw(c5403.04,3768.51) 5403.04,3868.51 5470.75,3868.51 C10.1 ; U9.1@4910.04,3776.84 cw(c4883.17,3750) 4921.15,3750 ; U9.1@4910.04,3776.84 4921.15,3765.73 4921.15,3750
  Bottom Layer w15: 4153.54,3612.2 ccw(c4148.41,3617.33) 4155.67,3617.33 OLED1.11 ; C14.1 4210.79,3638.03 OLED1.9 ; OLED1.6 4293.47,3633.78 C13.1 ; C24.2 4527.16,3230 ccw(c4527.16,3330) 4597.87,3259.29 4704.96,3366.38 cw(c4761.99,3309.36) 4761.99,3390 4960,3390 cw(c4960,3317.57) 5011.21,3368.79 5018.27,3361.73 cw(c4982.64,3326.1) CN1.1 ; v1(4731.01,3704.03) C18.1 ; v1(5030,3430) 5075.67,3430 C16.1 ; C21.1 cw(c5042.82,4178.65) 5035.16,4178.65 R10.2 v1(5078.74,4271.65) ; C10.1 5492.36,3890.12 ccw(c5421.65,3960.83) 5521.65,3960.83 v1(5521.65,4094.49)
pads on no net: CN1.5 CN1.6 OLED1. OLED1.7 SW1. SW1.3 SW1.4 SW1.5 U9.2 U9.3 U9.4 U9.18 U9.19 U9.20 U9.21 U9.22 U9.25 U9.26 U9.27 U9.28 U9.29 U9.30 U9.31 U9.32 U9.33 U9.38 U9.39 U9.40 U9.41 U9.45 U9.46 U10.3

## Polygon pours and split planes (outlines as drawn)
GND on Bottom Layer "GND_L02_P018" (hatched Horizontal grid 4 track 5, remove dead copper, pour order 18): 2826.27,4301.06 ccw(c2826.27,3760.56) 2285.84,3751.75 ccw(c2827.86,3721.85) 2827.86,3179.01 5198.32,3179.01 ccw(c5198.32,3749.88) 5769.19,3749.88 ccw(c5218,3749.88) 5218,4301.06 4391.23,4301.06 ccw(c4391.23,4281.37) 4371.55,4281.37 4371.55,4173.1 cw(c4342.02,4173.1) 4342.02,4143.58 3731.78,4143.58 cw(c3731.78,4173.1) 3702.26,4173.1 3702.26,4281.37 ccw(c3682.57,4281.37) 3682.57,4301.06
NetL1_2 on Bottom Layer "NETL1_2_L02_P013" (hatched Horizontal grid 4 track 5, remove dead copper, pour order 13): 3730.32,3395.67 3730.32,3179.13 3877.95,3179.13 3976.38,3277.56 3976.38,3307.09 3907.48,3307.09 3907.48,3395.67
NetC23_2 on Bottom Layer "NETC23_2_L02_P014" (hatched Horizontal grid 4 track 5, remove dead copper, pour order 14): 3710.63,3359.37 3560,3510 3560,3560 3490,3560 3490,3440 3464.57,3414.57 3464.57,3257.87 3503.94,3257.87 3503.94,3297.24 3582.68,3297.24 3612.2,3267.72 3612.2,3179.13 3710.63,3179.13
NetBT?_2 on Bottom Layer "Bottom Layer-No Net" (hatched Horizontal grid 4 track 5, remove dead copper, pour order 17): 3425.2,3690.94 3425.2,3257.87 3454.72,3257.87 3454.72,3405.51 3474.41,3425.2 3474.41,3671.26 3533.46,3730.32 3630,3730.32 3630,3927.17 3447.17,3927.17 3425.2,3905.2
VCC on Bottom Layer "Bottom Layer-VCC" (solid, remove dead copper, pour order 15): 3980,3346.46 4035.43,3346.46 4222.44,3159.45 4527.56,3159.45 4527.56,3188.98 4527.56,3417.44 4290,3655 3980,3655 3980,3590 4310,3590 4435,3465 4435,3188.98 4242.13,3188.98 4045.28,3385.83 3980,3385.83
NetC19_1 on Bottom Layer "NETC19_1_L02_P012" (hatched Horizontal grid 4 track 5, remove dead copper, pour order 12): 3980,3560 4130,3560 4130,3400 3980,3400
GND on Top Layer "GND_L01_P016" (solid, remove dead copper, pour order 16): 2824.8,4301.18 ccw(c2824.8,3760.68) 2284.37,3751.88 ccw(c2826.39,3721.97) 2826.39,3179.13 5196.85,3179.13 ccw(c5196.85,3750) 5767.72,3750 ccw(c5216.54,3750) 5216.54,4301.18 4389.76,4301.18 ccw(c4389.76,4281.5) 4370.08,4281.5 4370.08,4173.23 cw(c4340.55,4173.23) 4340.55,4143.7 3730.31,4143.7 cw(c3730.31,4173.23) 3700.79,4173.23 3700.79,4281.5 ccw(c3681.1,4281.5) 3681.1,4301.18

## Silkscreen, mask and mechanical layers (free items; w line width, h text height)
Mechanical 1:
  the board outline again, w10

## Text inside footprints (layer, text, board x,y; h text height)
BT?: Bottom Overlay "+" at 3334.26,4096.13 h51.18 r225; Bottom Overlay "-" at 2555.11,3522.92 h51.18 r270; Bottom Overlay "+" at 3439.25,3822.41 h78.74 r135